# Altium PCB 400797.PcbDoc (part 2 of 8)
Units mm, origin at the board's own origin, x right, y up, seen from the top; angles counter-clockwise.
Board outline 155 x 63.5 mm, 4 copper layers (Top Layer, Mid-Layer 1, Mid-Layer 2, Bottom Layer), stack 1.514 mm thick; 333 components, 292 nets, 1555 pads, 2205 vias.
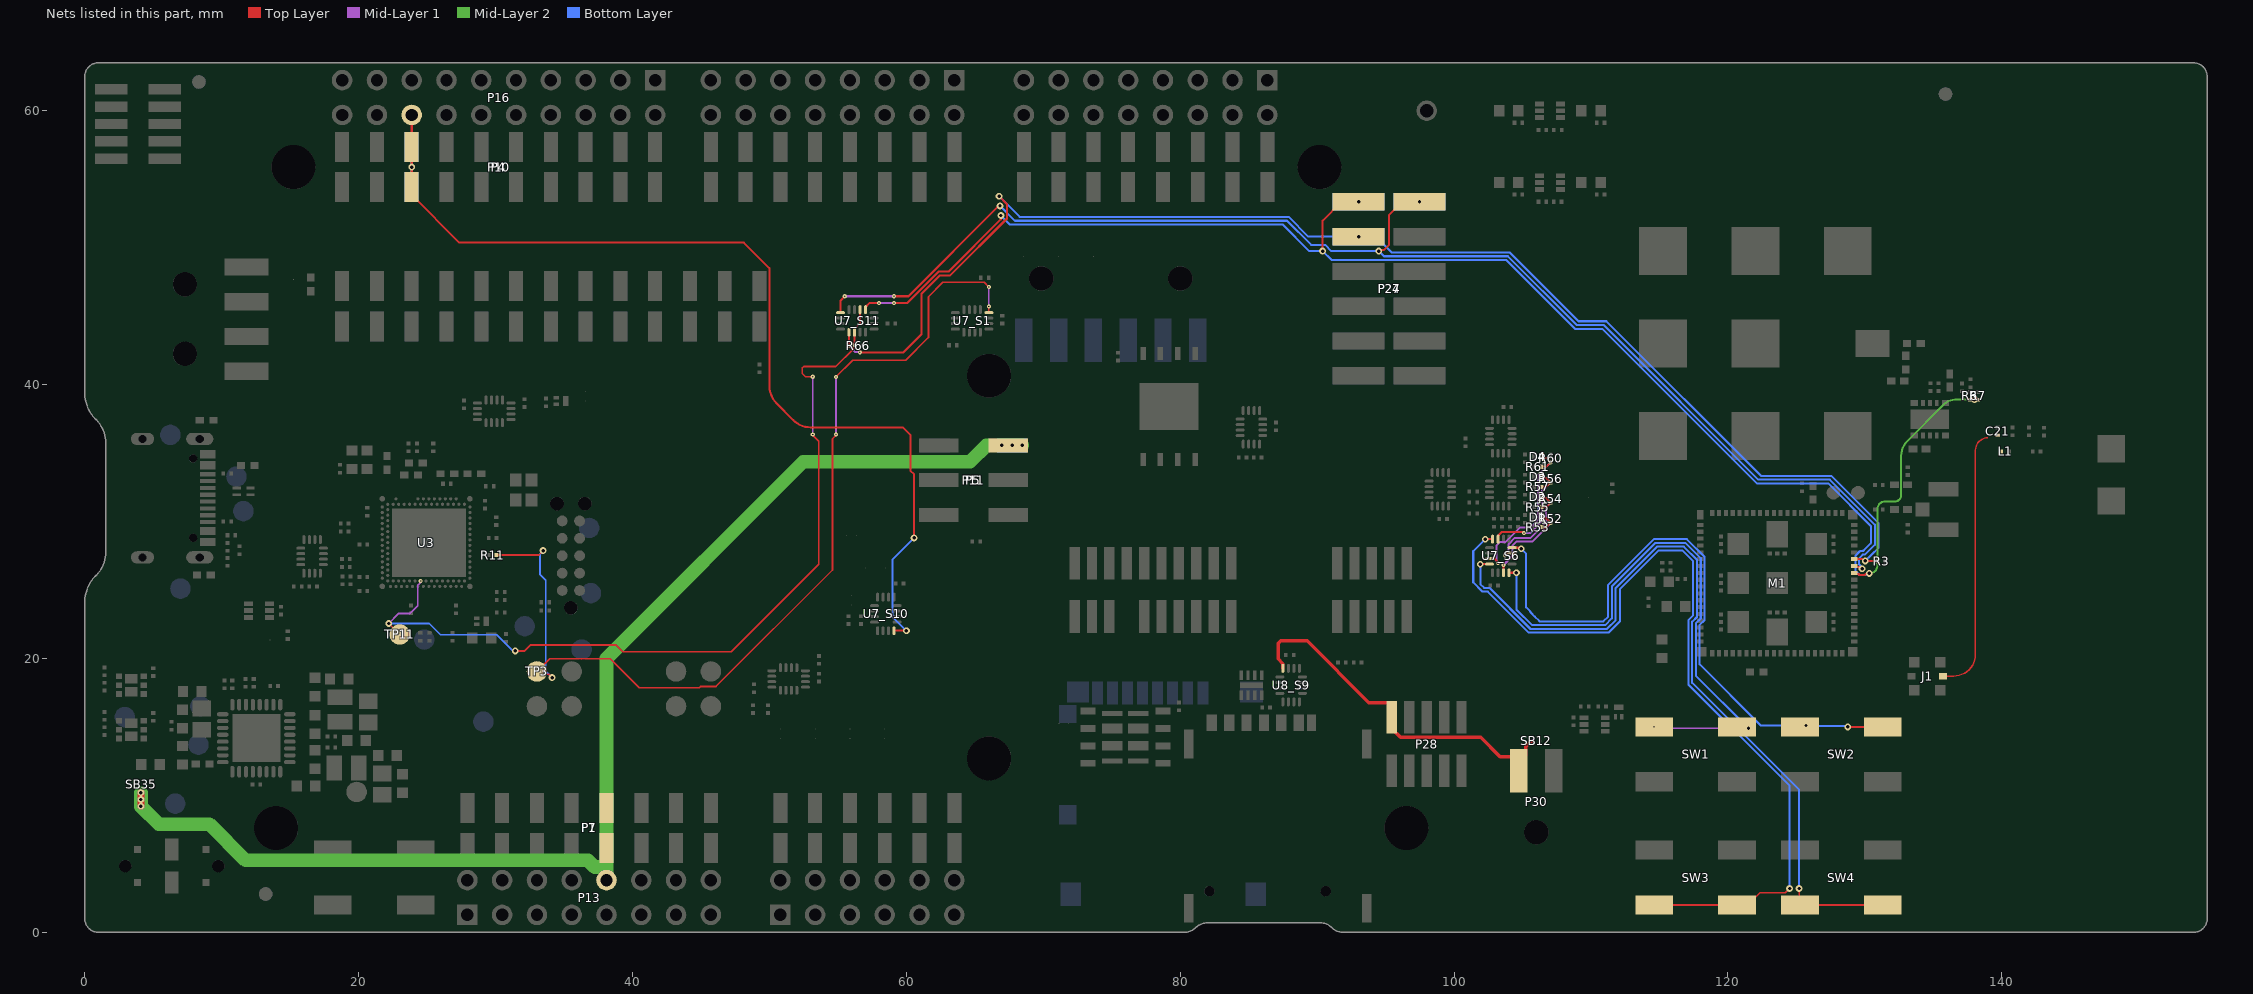
[diagram p4: the nets of this part, all layers, seen from the top]

## Footprints (in the part's own frame and the unit in brackets; to place one, negate y for a bottom-side part, rotate by r counter-clockwise, add the part's x,y. Pads: shape width x height; smd on the part's side, far side on the other; paste and mask are expansions set on the pad) (continued)
P822601 [mm] "Molded Diode, 2-Leads, Body 22,00x7,00mm, IPC Medium Density"
  rect 2x2 smd: 1(-8.89,-2.286) 2(-5.08,-2.286)
  Top Layer region: -21.6,1.254 -24.5,1.254 -24.5,3.754 -21.6,3.754
  Top Layer region: -22.4,-0.846 -24.5,-0.846 -24.5,0.854 -22.4,0.854
  Top Layer region: -21.6,-3.746 -24.5,-3.746 -24.5,-1.246 -21.6,-1.246
  Top Layer region: 24.6,-5.796 12.05,-5.796 12.05,-2.046 24.6,-2.046
  Top Layer region: 24.6,-2.046 21.7,-2.046 21.7,3.754 24.6,3.754
  Top Layer region: -3.67,-7.991 -8.05,-7.991 -8.05,-5.996 -3.67,-5.996
  Top Layer region: -3.67,-5.996 -5.71,-5.996 -5.71,-3.826 -3.67,-3.826
  Top Layer region: -3.67,-3.826 -6.399,-3.826 -6.4,-0.566 -3.67,-0.566
  Top Layer region: -10.45,-7.996 -12.45,-7.996 -12.45,-6.496 -10.45,-6.496
  Top Layer region: -9.2,-6.496 -12.45,-6.496 -12.45,-5.996 -9.2,-5.996
  Top Layer region: -9.45,-7.496 -9.95,-7.496 -9.95,-7.296 -9.45,-7.296
  Top Layer region: -8.45,-7.496 -8.95,-7.496 -8.95,-7.296 -8.45,-7.296
  Top Layer region: -8.45,-7.296 -9.95,-7.296 -9.95,-7.096 -8.45,-7.096
  Top Layer region: -9.45,-7.096 -9.95,-7.096 -9.95,-6.896 -9.45,-6.896
  Top Layer region: -8.45,-7.096 -8.95,-7.096 -8.95,-6.896 -8.45,-6.896
  Top Layer region: -8.6,-6.896 -8.8,-6.896 -8.8,-5.696 -8.6,-5.696
  Top Layer region: -8.2,-5.696 -9.2,-5.696 -9.2,-3.796 -8.2,-3.796
  Top Layer region: -7.3,-3.796 -10.4,-3.796 -10.4,-0.596 -7.3,-0.596
  Top Layer region: -9.45,-9.796 -9.95,-9.796 -9.95,-9.596 -9.45,-9.596
  Top Layer region: -8.45,-9.796 -8.95,-9.796 -8.95,-9.596 -8.45,-9.596
  Top Layer region: -8.45,-9.596 -9.95,-9.596 -9.95,-9.396 -8.45,-9.396
  Top Layer region: -9.45,-9.396 -9.95,-9.396 -9.95,-9.196 -9.45,-9.196
  Top Layer region: -8.45,-9.396 -8.95,-9.396 -8.95,-9.196 -8.45,-9.196
  Top Layer region: -9.6,-9.196 -9.8,-9.196 -9.8,-8.596 -9.6,-8.596
  Top Layer region: -9.45,-8.596 -9.95,-8.596 -9.95,-8.396 -9.45,-8.396
  Top Layer region: -8.45,-8.596 -8.95,-8.596 -8.95,-8.396 -8.45,-8.396
  Top Layer region: -8.45,-8.396 -9.95,-8.396 -9.95,-8.196 -8.45,-8.196
  Top Layer region: -9.45,-8.196 -9.95,-8.196 -9.95,-7.996 -9.45,-7.996
  Top Layer region: -8.45,-8.196 -8.95,-8.196 -8.95,-7.996 -8.45,-7.996
  Top Layer region: -9.6,-11.296 -9.8,-11.296 -9.8,-10.896 -9.6,-10.896
  Top Layer region: -9.45,-10.896 -9.95,-10.896 -9.95,-10.696 -9.45,-10.696
  Top Layer region: -8.45,-10.896 -8.95,-10.896 -8.95,-10.696 -8.45,-10.696
  Top Layer region: -8.45,-10.696 -9.95,-10.696 -9.95,-10.496 -8.45,-10.496
  Top Layer region: -9.45,-10.496 -9.95,-10.496 -9.95,-10.296 -9.45,-10.296
  Top Layer region: -8.45,-10.496 -8.95,-10.496 -8.95,-10.296 -8.45,-10.296
  Top Layer region: 24.75,-11.296 -8.05,-11.296 -8.05,-8.001 24.75,-8.001
  Top Layer region: -10.45,-11.296 -24.65,-11.296 -24.65,-7.996 -10.45,-7.996
  Bottom Layer region: -22.5,-3.546 -24.5,-3.546 -24.5,-2.546 -22.5,-2.546
  Bottom Layer region: -24.196,-2.546 -24.5,-2.546 -24.5,-2.046 -24.196,-2.046
  Bottom Layer region: -22.5,-2.046 -24.5,-2.046 -24.5,-1.046 -22.5,-1.046
  Bottom Layer region: -22.5,-1.046 -22.8,-1.046 -22.8,-0.546 -22.5,-0.546
  Bottom Layer region: -22.5,-0.546 -24.5,-0.546 -24.5,3.754 -22.5,3.754
  Bottom Layer region: -21,-3.546 -22,-3.546 -22,-1.046 -21,-1.046
  Bottom Layer region: -22.5,-5.046 -24.5,-5.046 -24.5,-4.046 -22.5,-4.046
  Bottom Layer region: 7.7,-5.796 6.7,-5.796 6.7,-4.896 7.7,-4.896
  Bottom Layer region: 9.2,-5.796 8.2,-5.796 8.2,-4.896 9.2,-4.896
  Bottom Layer region: 10.7,-5.796 9.7,-5.796 9.7,-4.896 10.7,-4.896
  Bottom Layer region: 13.2,-5.796 11.2,-5.796 11.2,-4.896 13.2,-4.896
  Bottom Layer region: 13.2,-4.896 6.7,-4.896 6.7,-4.596 13.2,-4.596
  Bottom Layer region: 7.7,-4.596 6.7,-4.596 6.7,-3.746 7.7,-3.746
  Bottom Layer region: 9.2,-4.596 8.2,-4.596 8.2,-3.746 9.2,-3.746
  Bottom Layer region: 10.7,-4.596 9.7,-4.596 9.7,-3.746 10.7,-3.746
  Bottom Layer region: 13.2,-4.596 11.2,-4.596 11.2,-3.746 13.2,-3.746
  Bottom Layer region: 6.2,-5.796 5.2,-5.796 5.2,-3.746 6.2,-3.746
  Bottom Layer region: 4.7,-5.796 3.7,-5.796 3.7,-3.746 4.7,-3.746
  Bottom Layer region: -3.86,-7.996 -12.45,-7.996 -12.45,-5.996 -3.86,-5.996
  Bottom Layer region: 24.752,-11.296 -24.648,-11.296 -24.65,-7.996 24.75,-7.996
  Multi-Layer pour cut-out: -39.95,5.08 39.05,5.08 39.05,-7.996 -39.95,-7.996
  silkscreen extent -25.2,-4.25 25.3,4.05, body extent -24.95,-4 25.05,4, height 3.2
RESC0603X03L_C [mm] "Chip Resistor, 2-Leads, Body 0.6x0.3mm, IPC High Density"
  rect 0.27x0.3 smd: 1(-0.285,0) 2(0.285,0)
  body extent -0.3,-0.15 0.3,0.15, height 0.23
RESC0603X03L_C_NC [mm] "Chip Resistor, 2-Leads, Body 0.6x0.3mm, IPC High Density"
  rect 0.27x0.3 smd: 1(-0.285,0) 2(0.285,0)
RESC1005X04L [mm] "Chip Resistor, 2-Leads, Body 1.0x0.5mm, IPC High Density"
  rect 0.6x0.55 smd mask+0.05: 1(-0.5,0) 2(0.5,0)
  body extent -0.5,-0.25 0.5,0.25, height 0.3
RESC1005X04L_NC [mm] "Chip Resistor, 2-Leads, Body 1.0x0.5mm, IPC High Density"
  rect 0.6x0.55 smd mask+0.05: 1(-0.5,0) 2(0.5,0)
RESC2012X11L [mm] "Chip Resistor, 2-Leads, Body 2.0x1.3mm, IPC High Density"
  rect 1.15x1.35 smd: 1(-0.775,0) 2(0.775,0)
  silkscreen extent -1.45,-0.77 1.45,0.77, body extent -1,-0.62 1,0.63, height 0.5
SD-80259-001 [mm] "USB TYPE C RECEPTACLE, 16 PIN"
  round 0.6 hole 0.6 unplated: 0(-2.89,1.315) 0(2.89,1.315)
  rect 0.6x1.14 smd: A1(-3.2,2.385) A4(-2.4,2.385) A9(2.4,2.385) A12(3.2,2.385)
  rect 0.3x1.14 smd: A5(-1.25,2.385) A6(-0.25,2.385) A7(0.25,2.385) A8(1.25,2.385) B5(1.75,2.385) B6(0.75,2.385) B7(-0.75,2.385) B8(-1.75,2.385)
  oval 0.9x2 hole 0.6 slot 1.7 at 90 deg: SHLD(-4.325,1.795) SHLD(4.325,1.795)
  oval 0.9x1.7 hole 0.6 slot 1.4 at 90 deg: SHLD(-4.325,-2.385) SHLD(4.325,-2.385)
  oval 0.9x2 on Top Paste: ""(-4.32,1.795) ""(4.32,1.795)
  oval 0.9x1.7 on Top Paste: ""(-4.32,-2.385) ""(4.32,-2.385)
  silkscreen extent -4.33,-4.48 4.33,0.47, body extent -4.48,-4.98 4.48,2.74, height 3.26
SEGGER_LOGO_S [mm] "Logo 7.82 mm x 3.84 mm, print overlay"
  silkscreen extent -3.91,-1.92 3.91,1.92
Shunt_2.54mm_Horizontal [mm]
  body extent 0,-2.54 5.03,2.54, height 2.99
SKY65943-11 [mm]
  rect 0.425x0.515 smd mask+0.05: 1(-1.188,1.144) 5(-1.188,-1.144) 6(1.188,-1.144) 10(1.188,1.144)
  rect 0.425x0.275 smd mask+0.05: 2(-1.188,0.5) 3(-1.188,0) 4(-1.188,-0.5) 7(1.188,-0.5) 8(1.188,0) 9(1.188,0.5)
  rect 1.45x2.802 smd paste-2 mask-5: 11(0,0)
  rect 1.55x2.487 on Top Solder: ""(0,0)
  Top Layer region: -0.988,0.887 -0.713,0.887 -0.713,1.4 -0.988,1.4
  Top Layer region: 0.713,-1.4 0.988,-1.4 0.988,-0.887 0.713,-0.887
  Top Layer region: 0.712,0.362 0.987,0.362 0.987,0.637 0.712,0.637
  Top Layer region: -0.712,-0.362 -0.987,-0.362 -0.987,-0.637 -0.712,-0.637
  body extent -1.25,-1.25 1.25,1.25, height 0.71
SOCKET_1x6_SMD [mm] "Socket, 2.54mm, SMD"
  rect 1.02x2.19 smd: 1(0,-1.465) 1(0,1.465) 2(2.54,-1.465) 2(2.54,1.465) 3(5.08,-1.465) 3(5.08,1.465) 4(7.62,-1.465) 4(7.62,1.465) 5(10.16,-1.465) 5(10.16,1.465) 6(12.7,1.465) 6(12.7,-1.465)
  silkscreen extent -1.27,-1.27 13.97,1.27, body extent -1.27,-2.29 13.97,2.29, height 7.47
SOCKET_1x8_SMD [mm] "Socket, 2.54mm, SMD"
  rect 1.02x2.19 smd: 1(0,-1.465) 1(0,1.465) 2(2.54,-1.465) 2(2.54,1.465) 3(5.08,-1.465) 3(5.08,1.465) 4(7.62,-1.465) 4(7.62,1.465) 5(10.16,-1.465) 5(10.16,1.465) 6(12.7,1.465) 6(12.7,-1.465) 7(15.24,-1.465) 7(15.24,1.465) 8(17.78,-1.465) 8(17.78,1.465)
  silkscreen extent -1.27,-1.27 19.05,1.27, body extent -1.27,-2.29 19.05,2.29, height 7.47
SOCKET_1x10_SMD [mm] "Socket, 2.54mm, SMD"
  rect 1.02x2.19 smd: 1(0,1.465) 1(0,-1.465) 2(2.54,-1.465) 2(2.54,1.465) 3(5.08,-1.465) 3(5.08,1.465) 4(7.62,-1.465) 4(7.62,1.465) 5(10.16,-1.465) 5(10.16,1.465) 6(12.7,-1.465) 6(12.7,1.465) 7(15.24,-1.465) 7(15.24,1.465) 8(17.78,-1.465) 8(17.78,1.465) 9(20.32,-1.465) 9(20.32,1.465) 10(22.86,-1.465) 10(22.86,1.465)
  silkscreen extent -1.27,-1.27 24.13,1.27, body extent -1.27,-2.29 24.13,2.29, height 7.47
SOCKET_2x3_SMD-2.54mm-bottom-NC [mm] "Socket, 2.54mm, SMD"
  rect 1.02x2.22 smd far side: 1(-2.54,-2.825) 2(-2.54,2.825) 3(0,-2.825) 4(0,2.825) 5(2.54,-2.825) 6(2.54,2.825)
SOCKET_2x6_SMD-2.54mm#1 [mil]
  rect 50x150 smd: 1(-250,-87.5) 2(-250,87.5) 3(-150,-87.5) 4(-150,87.5) 5(-50,-87.5) 6(-50,87.5) 7(50,-87.5) 8(50,87.5) 9(150,-87.5) 10(150,87.5) 11(250,-87.5) 12(250,87.5)
  silkscreen extent -310,-127 300,100, body extent -300,-138 300,139, height 290
SOCKET_2x6_SMD-2.54mm#2 [mil] "Board-Board Conn, Header, 4-way, 2-row"
  rect 50x150 smd: 1(-250,87.5) 2(-250,-87.5) 3(-150,87.5) 4(-150,-87.5) 5(-50,87.5) 6(-50,-87.5) 7(50,87.5) 8(50,-87.5) 9(150,87.5) 10(150,-87.5) 11(250,87.5) 12(250,-87.5)
  silkscreen extent -310,-100 300,127
SODFL35X40-2N [mm] "SODFL, 2-Leads, Body 0,60x0,35mm, IPC Medium Density"
  rect 0.25x0.6 smd: 1(-0.325,0) 3(0.325,0)
  body extent -0.53,-0.33 0.53,0.33, height 0.4
Solderbridge [mil]
  round 1 smd paste-99999: 1(-13.78,0) 2(13.78,0)
  Top Layer region: -7.49,19.36 -15.76,15.74 -21.55,8.8 -23.62,0 -23.62,0 -21.55,-8.79 -15.76,-15.74 -7.49,-19.36 -7.49,-19.36 -6.18,-19.31 -5.02,-18.71 -4.22,-17.68 -3.94,-16.4 -3.94,-16.4 -3.94,16.4 -4.22,17.68 -5.02,18.71 -6.18,19.31 -7.49,19.36
  Top Layer region: 7.49,-19.36 15.76,-15.74 21.55,-8.8 23.62,0 23.62,0 21.55,8.79 15.76,15.74 7.49,19.36 7.49,19.36 6.18,19.31 5.02,18.71 4.22,17.68 3.94,16.4 3.94,16.4 3.94,-16.4 4.22,-17.68 5.02,-18.71 6.18,-19.31 7.49,-19.36
Solderbridge_Shorted [mil]
  round 1 smd paste-99999: 1(-13.78,0) 2(13.78,0)
  Top Layer region: -4.92,3.94 -4.92,-3.94 4.92,-3.94 4.92,3.94
  Top Layer region: -7.49,19.36 -15.76,15.74 -21.55,8.8 -23.62,0 -23.62,0 -21.55,-8.79 -15.76,-15.74 -7.49,-19.36 -7.49,-19.36 -6.18,-19.31 -5.02,-18.71 -4.22,-17.68 -3.94,-16.4 -3.94,-16.4 -3.94,16.4 -4.22,17.68 -5.02,18.71 -6.18,19.31 -7.49,19.36
  Top Layer region: 7.49,-19.36 15.76,-15.74 21.55,-8.8 23.62,0 23.62,0 21.55,8.79 15.76,15.74 7.49,19.36 7.49,19.36 6.18,19.31 5.02,18.71 4.22,17.68 3.94,16.4 3.94,16.4 3.94,-16.4 4.22,-17.68 5.02,-18.71 6.18,-19.31 7.49,-19.36
Solderbridge_Shorted_Power [mil]
  round 1 smd paste-99999: 1(-13.84,0.21) 2(13.72,0.21)
  Top Layer region: -4.92,9.84 4.92,9.84 4.92,-9.84 -4.92,-9.84
  Top Layer region: 7.43,-19.16 15.71,-15.53 21.49,-8.59 23.56,0.21 23.56,0.21 21.49,9 15.71,15.94 7.43,19.57 7.43,19.57 6.12,19.52 4.96,18.92 4.16,17.89 3.88,16.61 3.88,16.61 3.88,-16.2 4.16,-17.47 4.96,-18.51 6.12,-19.11 7.43,-19.16
  Top Layer region: -7.54,19.57 -15.82,15.94 -21.61,9 -23.68,0.21 -23.68,0.21 -21.61,-8.59 -15.82,-15.53 -7.54,-19.16 -7.54,-19.16 -6.24,-19.11 -5.08,-18.51 -4.28,-17.47 -4,-16.2 -3.99,-16.2 -3.99,16.61 -4.28,17.89 -5.08,18.92 -6.24,19.52 -7.54,19.57
SON50P210X160X65_HS-9N [mm] "SON, 8-Leads, Body 2.10x1.60mm, Pitch 0.50mm, Thermal Pad 1.70x0.4mm, IPC Medium Density"
  rect 0.7x0.25 smd mask+0.05: 1(-0.725,0.75) 2(-0.725,0.25) 3(-0.725,-0.25) 4(-0.725,-0.75) 5(0.725,-0.75) 6(0.725,-0.25) 7(0.725,0.25) 8(0.725,0.75)
  rect 0.4x1.7 smd paste-2 mask+0.05: 9(0,0)
  rect 0.3x0.75 on Top Paste: ""(0,0.425) ""(0,-0.425)
  silkscreen extent -1.26,1.2 -1.16,1.26, body extent -0.85,-1.1 0.85,1.1, height 0.65
SON127P600X90_HS-8N [mm] "SON, 8-Leads, Body 5.00x6.00mm, Pitch 1.27mm, IPC Medium Density"
  rect 1.5x0.35 smd paste-1.27: 0(-0.95,-1.73) 0(-0.95,1.73) 0(0.95,-1.73) 0(0.95,1.73)
  rect 1.5x0.7 smd paste-1.27: 0(-0.95,-0.635) 0(-0.95,0.635) 0(0.95,-0.635) 0(0.95,0.635)
  rect 1.1x0.5 smd paste-1.27: 1(-2.75,1.905) 2(-2.75,0.635) 3(-2.75,-0.635) 4(-2.75,-1.905) 5(2.75,-1.905) 6(2.75,-0.635) 7(2.75,0.635) 8(2.75,1.905)
  silkscreen extent -3.6,-2.58 3.08,2.72, body extent -3,-2.5 3,2.5, height 0.65
SON127P800X80_HS-9N [mm] "SON, 8-Leads, Body 6.00x8.00mm, Pitch 1.27mm, Thermal Pad 4.30x3.40mm, IPC Medium Density"
  rect 0.95x0.4 smd: 1(-3.87,1.905) 2(-3.87,0.635) 3(-3.87,-0.635) 4(-3.87,-1.905) 5(3.87,-1.905) 6(3.87,-0.635) 7(3.87,0.635) 8(3.87,1.905)
  rect 3.4x4.3 smd paste-1.7: 9(0,0)
  silkscreen extent -4.52,-3.18 4.18,3.52, body extent -4.05,-3.05 4.05,3.05, height 0.8
SOTFL50P162X60-6N [mm] "SOTFL, 6-Leads, Body 1.60x1.63mm, Pitch 0.50mm, IPC Medium Density"
  rect 0.65x0.35 smd: 1(-0.775,0.5) 2(-0.775,0) 3(-0.775,-0.5) 4(0.775,-0.5) 5(0.775,0) 6(0.775,0.5)
  silkscreen extent -0.9,-0.82 0.05,1.35, body extent -0.81,-0.85 0.81,0.85, height 0.6
TC2050-IDC-NLFP [mil]
  round 39 hole 39 unplated: 0(-150,0) 0(150,-40) 0(150,40)
  round 31 smd paste-196.85: 1(-100,-25) 2(-50,-25) 3(0,-25) 4(50,-25) 5(100,-25) 6(100,25) 7(50,25) 8(0,25) 9(-50,25) 10(-100,25)
  Top Layer pour cut-out: -100,25 -100,-25 100,-25 100,25
TESTPAD-TH [mm]
  round 1.5 hole 1: 1(0,0)
TP_SMD_D1.0mm [mm] "Test point - pad 1.0mm"
  round 1 smd paste-5: 1(0,0)
TP_SMD_D1.5mm [mm] "Test point - pad 1.5mm"
  round 1.5 smd paste-5: 1(0,0)
  body extent -0.75,-0.75 0.75,0.75, height 0.05
UFDFN50P120X250X55-8N [mm]
  round 0.025 smd: 1(-0.5,0.75) 4(-0.5,-0.75) 5(0.5,-0.75) 8(0.5,0.75)
  rect 0.6x0.2 smd: 2(-0.5,0.25) 3(-0.5,-0.25) 6(0.5,-0.25) 7(0.5,0.25)
  Top Layer region: 0.8,-0.85 0.4,-0.85 0.4,-1.05 0.2,-1.05 0.2,-0.65 0.8,-0.65
  Top Layer region: -0.2,-1.05 -0.4,-1.05 -0.4,-0.85 -0.8,-0.85 -0.8,-0.65 -0.2,-0.65
  Top Layer region: 0.4,0.85 0.8,0.85 0.8,0.65 0.2,0.65 0.2,1.05 0.4,1.05
  Top Layer region: -0.2,0.65 -0.8,0.65 -0.8,0.85 -0.4,0.85 -0.4,1.05 -0.2,1.05
  silkscreen extent -1.08,1.21 -0.95,1.33, body extent -0.6,-1.25 0.6,1.25, height 0.6
WEE_3x4.5mm [mm]
  silkscreen extent -1.47,-2.7 1.47,1.71
XQFN40P180X260X50-16N [mm] "QFN, 16-Leads, Body 1.80x2.60mm, Pitch 0.40mm, IPC Medium Density"
  oval 0.65x0.22 smd paste-0.02 mask+0.04: 1(-0.825,0.6) 2(-0.825,0.2) 3(-0.825,-0.2) 4(-0.825,-0.6) 9(0.825,-0.6) 10(0.825,-0.2) 11(0.825,0.2) 12(0.825,0.6)
  oval 0.22x0.65 smd paste-0.02 mask+0.04: 5(-0.6,-1.225) 6(-0.2,-1.225) 7(0.2,-1.225) 8(0.6,-1.225) 13(0.6,1.225) 14(0.2,1.225) 15(-0.2,1.225) 16(-0.6,1.225)
  body extent -0.91,-1.31 0.91,1.31, height 0.55

## Part data
A1: "ANTENNA PRESTTA OCTABAND LTE", Manufacturer=Ethertronics, Part number IPS=00000009001, Part number NEMS=100700043, Part number Norautron=N.A., Artikkelnr Noca=N.A., Author=rsk, Component Class=Antennas, Component Status=Active, ComponentLink1Description=Datasheet, ComponentLink1URL=N.A., ComponentLink2Description="Supplier link", ComponentLink2URL=N.A., Footprint Doc=P822601, HelpURL=http://www.ethertronics.com/wp-content/uploads/2016/11/Prestta-P822601-P822602-Standard-Cellular-Octa-Band-20160904.pdf, LatestRevisionDate=2017-07-28, Manufacturer Part Number=P822601, Note=N.A., Pad Count=2, Part Number=P822601, PartId=100700043, Published=2017-07-28, Supplier 1=moreelectronics.dk, Supplier 2=Digi-Key, Supplier Part Number 1=P822601, Supplier Part Number 2=939-1057-1-ND
A2: library part DSGP.1575.18.4.C.02, "18 x 18 mm Low Profile GPS L1 / GALILEO E1 Passive Patch Antenna", Manufacturer=Taoglas, Part number IPS=00000007687, Part number NEMS=100700073, Part number Norautron=N.A., Artikkelnr Noca=N.A., Author=rubr, Component Class=Antennas, Component Status=Active, ComponentLink1Description=Datasheet, ComponentLink1URL=https://www.taoglas.com/datasheets/DSGP.1575.18.4.A.02.pdf, ComponentLink2Description="Supplier link", ComponentLink2URL=https://www.digikey.com/product-detail/en/taoglas-limited/DSGP.1575.18.4.A.02/931-1511-1-ND/8275289, Footprint Doc=DSGP.1575.18.4.C.02, HelpURL=https://www.taoglas.com/product/18184mm-dsgp-1575-184-gps-l1-galileo-e1-ceramic-patch-copy/?compare=16929, LatestRevisionDate=2023-01-01, Manufacturer Part Number=DSGP.1575.18.4.C.02, Note=N.A., Pad Count=2, Part Number=DSGP.1575.18.4.C.02, PartId=100700073, Published=2022-01-13, Supplier 1=N.A., Supplier 2=N.A., Supplier Part Number 1=N.A., Supplier Part Number 2=N.A.
C1 C2: library part C0201-1µ0-10V-X5R-GRM033R61A105ME15, "Capacitor, X5R, ±20%, 10V", Manufacturer=Murata, Manufacturer Part Number=GRM033R61A105ME15, Part number IPS=N.A., Part number NEMS=100200545, Supplier Part Number 1=490-13226-1-ND, Artikkelnr Noca=N.A., Author=rubr, Component Class=Capacitors, Component Status=Active, ComponentLink1Description=Datasheet, ComponentLink1URL=https://search.murata.co.jp/Ceramy/image/img/A01X/G101/ENG/GRM033R61A105ME15-01.pdf, ComponentLink2Description="Supplier link", ComponentLink2URL=N.A., Footprint Doc=0201, HelpURL=https://www.murata.com/en-us/products/productdetail?partno=GRM033R61A105ME15%23, LatestRevisionDate=2023-03-22, Note=10V, Pad Count=2, Part Number=C0201-1µ0-10V-X5R-GRM033R61A105ME15, Part number Norautron=N.A., PartId=100200545, Published=2023-03-22, Supplier 1=Digi-Key, Supplier 2=N.A., Supplier Part Number 2=N.A.
C3 C7: library part C0603-10µ-10V-X6S-GRM188C81A106MA73, "Capacitor, Ceramic, 10µF 10V X6S 0603,±20%", Manufacturer=Murata, Manufacturer Part Number=GRM188C81A106MA73, Part number IPS=N.A., Part number NEMS=100200520, Supplier Part Number 1=490-7197-2-ND, Artikkelnr Noca=N.A., Author=prbu, Component Class=Capacitors, Component Status=Active, ComponentLink1Description=Datasheet, ComponentLink1URL=https://www.murata.com/en-sg/products/productdetail?partno=GRM188C81A106MA73%23, ComponentLink2Description="Supplier link", ComponentLink2URL=https://www.digikey.com/en/products/detail/murata-electronics/GRM188C81A106MA73D/3900461, Footprint Doc=0603, HelpURL=N.A., LatestRevisionDate=2022-07-01, Note=10V, Pad Count=2, Part Number=C0603-10µ-10V-X6S-GRM188C81A106MA73, Part number Norautron=N.A., PartId=100200520, Published=2022-07-01, Supplier 1=Digi-Key, Supplier 2=Mouser, Supplier Part Number 2=81-GRM188C81A106MA3D
C4 C8 C10 C15 C16 C24 C25 C26 C27 C31 C32 C33 C34 C39 C42 C43 C51 C52_S1 C52_S2 C52_S3 C52_S4 C52_S5 C52_S6 C52_S8 C52_S10 C52_S11 C53_S7 C53_S9 C62: library part C0201-100n, "Capacitor, X5R, ±10%", Manufacturer=N.A., Part number IPS="00000001248, 00000002505", Part number NEMS=100200078, Part number Norautron=262071862, Artikkelnr Noca=N.A., Author=rsk, Component Class=Capacitors, Component Status=Active, ComponentLink1Description=Datasheet, ComponentLink1URL=N.A., ComponentLink2Description="Supplier link", ComponentLink2URL=N.A., Footprint Doc=0201, HelpURL=N.A., LatestRevisionDate=2017-11-09, Manufacturer Part Number=N.A., Note=16V, Pad Count=2, Part Number=C0201-100n, PartId=100200078, Published=2014-11-13, Supplier 1=N.A., Supplier 2=N.A., Supplier Part Number 1=N.A., Supplier Part Number 2=N.A.
  C16: Assembly="Not mounted"
C5 C6: library part C0402-4µ7-10V-X5R, "Capacitor, X5R, 10V", Manufacturer=Murata, Manufacturer Part Number=GRM155R61A475MEAAD, Part number IPS=N.A., Part number NEMS=100200415, Supplier Part Number 1=490-14306-1-ND, Artikkelnr Noca=N.A., Author=rsk, Component Class=Capacitors, Component Status=Active, ComponentLink1Description=Datasheet, ComponentLink1URL=http://search.murata.co.jp/Ceramy/image/img/A01X/G101/ENG/GRM155R61A475MEAA-01.pdf, ComponentLink2Description="Supplier link", ComponentLink2URL=https://www.digikey.com/product-detail/en/murata-electronics-north-america/GRM155R61A475MEAAD/490-14306-1-ND/6234742, Footprint Doc=0402, HelpURL=https://psearch.en.murata.com/capacitor/product/GRM155R61A475MEAA%23.html, LatestRevisionDate=2020-10-13, Note=10V, Pad Count=2, Part Number=C0402-4µ7-10V-X5R, Part number Norautron=N.A., PartId=100200415, Published=2018-10-04, Supplier 1=Digi-Key, Supplier 2=N.A., Supplier Part Number 2=N.A.
C9: library part C0402-1µ0-16V-X5R, "Capacitor, Ceramic, X5R, ±10%, 16V", Manufacturer=Murata, Manufacturer Part Number=GRT155R61C105KE01D, Part number IPS=N.A., Part number NEMS=100200452, Supplier Part Number 1=490-12255-1-ND, Artikkelnr Noca=N.A., Author=rsk, Component Class=Capacitors, Component Status=Active, ComponentLink1Description=Datasheet, ComponentLink1URL=https://search.murata.co.jp/Ceramy/image/img/A01X/G101/ENG/GRT155R61C105KE01-01.pdf, ComponentLink2Description="Supplier link", ComponentLink2URL=https://www.murata.com/en-global/products/productdetail?partno=GRT155R61C105KE01%23, Footprint Doc=0402, HelpURL=N.A., LatestRevisionDate=2020-12-15, Note=16V, Pad Count=2, Part Number=C0402-1µ0-16V-X5R, Part number Norautron=N.A., PartId=100200452, Published=2020-12-15, Supplier 1=Digi-Key, Supplier 2=Mouser, Supplier Part Number 2=81-GRT155R61C105KE1D
C11 C12 C13: library part C0201-39p, "Capacitor, NP0, ±1%, 25V", Manufacturer=Murata, Manufacturer Part Number=GRM0335C1E390FA01, Part number IPS=00000001668, Part number NEMS=100200039, Part number Norautron=N.A., Artikkelnr Noca=N.A., Author=rsk, Component Class=Capacitors, Component Status=Active, ComponentLink1Description=Datasheet, ComponentLink1URL=N.A., ComponentLink2Description="Supplier link", ComponentLink2URL=N.A., Footprint Doc=0201, HelpURL=N.A., LatestRevisionDate=2019-04-16, Note=25V, Pad Count=2, Part Number=C0201-39p, PartId=100200039, Published=2019-04-16, Supplier 1=N.A., Supplier 2=N.A., Supplier Part Number 1=N.A., Supplier Part Number 2=N.A.
C14 C17: library part C0201-100p, "Capacitor, NP0, ±2%, 25V", Manufacturer=Murata, Manufacturer Part Number=GRM0335C1E101GA01, Part number IPS=00000007853, Part number NEMS=100200044, Part number Norautron=N.A., Artikkelnr Noca=N.A., Author=rsk, Component Class=Capacitors, Component Status=Active, ComponentLink1Description=Datasheet, ComponentLink1URL=N.A., ComponentLink2Description="Supplier link", ComponentLink2URL=N.A., Footprint Doc=0201, HelpURL=N.A., LatestRevisionDate=2019-04-16, Note=25V, Pad Count=2, Part Number=C0201-100p, PartId=100200044, Published=2019-04-16, Supplier 1=N.A., Supplier 2=N.A., Supplier Part Number 1=N.A., Supplier Part Number 2=N.A.
C18: library part C0402-N.C., "Not mounted", Manufacturer=N.A., Part number NEMS=100200105, Artikkelnr Noca=N.A., Assembly="Not mounted", Author=rsk, Component Class=Capacitors, Component Status=Active, ComponentLink1Description=Datasheet, ComponentLink1URL=N.A., ComponentLink2Description="Supplier link", ComponentLink2URL=N.A., Footprint Doc=0402, HelpURL=N.A., LatestRevisionDate=2009-05-08, Manufacturer Part Number=N.A., Note="Chip Cap", Pad Count=2, Part Number=C0402-N.C., Part number IPS=N.A., Part number Norautron=N.A., PartId=100200105, Published=2009-05-08, Supplier 1=N.A., Supplier 2=N.A., Supplier Part Number 1=N.A., Supplier Part Number 2=N.A.
C19 C21 C22 C23 C49: library part C0201-N.C., "Not mounted", Manufacturer=N.A., Part number NEMS=100200001, Artikkelnr Noca=N.A., Assembly="Not mounted", Author=rsk, Component Class=Capacitors, Component Status=Active, ComponentLink1Description=Datasheet, ComponentLink1URL=N.A., ComponentLink2Description="Supplier link", ComponentLink2URL=N.A., Footprint Doc=0201, HelpURL=N.A., LatestRevisionDate=2014-11-13, Manufacturer Part Number=N.A., Note="Chip Cap", Pad Count=2, Part Number=C0201-N.C., Part number IPS=N.A., Part number Norautron=N.A., PartId=100200001, Published=2014-11-13, Supplier 1=N.A., Supplier 2=N.A., Supplier Part Number 1=N.A., Supplier Part Number 2=N.A.
C20: library part C0201-3.5p, "Capacitor, NP0, ±0.1pF, 25V", Manufacturer=Murata, Manufacturer Part Number=GJM0335C1H3R5BB01E, Part number IPS=00000001469, Part number NEMS=100200023, Part number Norautron=N.A., Artikkelnr Noca=N.A., Author=rsk, Component Class=Capacitors, Component Status=Active, ComponentLink1Description=Datasheet, ComponentLink1URL=N.A., ComponentLink2Description="Supplier link", ComponentLink2URL=N.A., Footprint Doc=0201, HelpURL=N.A., LatestRevisionDate=2019-02-22, Note=25V, Pad Count=2, Part Number=C0201-3.5p, PartId=100200023, Published=2019-02-22, Supplier 1=N.A., Supplier 2=N.A., Supplier Part Number 1=N.A., Supplier Part Number 2=N.A.
C28 C29 C35 C36 C40 C64: library part C0402-1µ0-10V-X5R, "Capacitor, Ceramic, X5R, ±10%, 10V", Manufacturer=N.A., Part number NEMS=100200482, Artikkelnr Noca=N.A., Author=rubr, Component Class=Capacitors, Component Status=Active, ComponentLink1Description=Datasheet, ComponentLink1URL=N.A., ComponentLink2Description="Supplier link", ComponentLink2URL=N.A., Footprint Doc=0402, HelpURL=N.A., LatestRevisionDate=2021-07-22, Manufacturer Part Number=N.A., Note=10V, Pad Count=2, Part Number=C0402-1µ0-10V-X5R, Part number IPS=N.A., Part number Norautron=N.A., PartId=100200482, Published=2021-07-22, Supplier 1=N.A., Supplier 2=N.A., Supplier Part Number 1=N.A., Supplier Part Number 2=N.A.
C30: library part C0201-2n2, "Capacitor, X7R, ±10%, 10V", Manufacturer=N.A., Part number IPS=00000001778, Part number NEMS=100200060, Part number Norautron=26470002, Artikkelnr Noca=N.A., Author=rsk, Component Class=Capacitors, Component Status=Active, ComponentLink1Description=Datasheet, ComponentLink1URL=N.A., ComponentLink2Description="Supplier link", ComponentLink2URL=N.A., Footprint Doc=0201, HelpURL=N.A., LatestRevisionDate=2014-11-13, Manufacturer Part Number=N.A., Note=10V, Pad Count=2, Part Number=C0201-2n2, PartId=100200060, Published=2014-11-13, Supplier 1=N.A., Supplier 2=N.A., Supplier Part Number 1=N.A., Supplier Part Number 2=N.A.
C37 C38 C58: library part C0603-4µ7-10V-X5R, "Capacitor, Ceramic, X5R, ±10%, 10V", Manufacturer=N.A., Part number NEMS=100200479, Part number Norautron=262081761, Artikkelnr Noca=N.A., Author=rubr, Component Class=Capacitors, Component Status=Active, ComponentLink1Description=Datasheet, ComponentLink1URL=N.A., ComponentLink2Description="Supplier link", ComponentLink2URL=N.A., Footprint Doc=0603, HelpURL=N.A., LatestRevisionDate=2021-07-22, Manufacturer Part Number=N.A., Note=10V, Pad Count=2, Part Number=C0603-4µ7-10V-X5R, Part number IPS=N.A., PartId=100200479, Published=2021-07-22, Supplier 1=N.A., Supplier 2=N.A., Supplier Part Number 1=N.A., Supplier Part Number 2=N.A.
C41 C48 C50: library part C0201-10n, "Capacitor, X7R, ±10%", Manufacturer=N.A., Part number IPS=00000003480, Part number NEMS=100200067, Part number Norautron=26621779, Artikkelnr Noca=N.A., Author=rsk, Component Class=Capacitors, Component Status=Active, ComponentLink1Description=Datasheet, ComponentLink1URL=N.A., ComponentLink2Description="Supplier link", ComponentLink2URL=N.A., Footprint Doc=0201, HelpURL=N.A., LatestRevisionDate=2017-11-09, Manufacturer Part Number=N.A., Note=10V, Pad Count=2, Part Number=C0201-10n, PartId=100200067, Published=2014-11-13, Supplier 1=N.A., Supplier 2=N.A., Supplier Part Number 1=N.A., Supplier Part Number 2=N.A.
C44 C45 C46 C47: library part C0201-1µ0, "Capacitor, X5R, ±10%", Manufacturer=N.A., Part number IPS=00000001723, Part number NEMS=100200084, Supplier Part Number 1=1276-6795-1-ND, Artikkelnr Noca=N.A., Author=rsk, Component Class=Capacitors, Component Status=Active, ComponentLink1Description=Datasheet, ComponentLink1URL=N.A., ComponentLink2Description="Supplier link", ComponentLink2URL=N.A., Footprint Doc=0201, HelpURL=N.A., LatestRevisionDate=2016-08-22, Manufacturer Part Number=N.A., Note=10V, Pad Count=2, Part Number=C0201-1µ0, Part number Norautron=N.A., PartId=100200084, Published=2009-05-08, Supplier 1=Digi-Key, Supplier 2=N.A., Supplier Part Number 2=N.A.
C54: library part C0603-1µ0-10V-X5R, "Capacitor, Ceramic, 1.0µF 10V X5R 0603,±10%", Manufacturer=N.A., Part number NEMS=100200528, Artikkelnr Noca=N.A., Author=getr, Component Class=Capacitors, Component Status=Active, ComponentLink1Description=Datasheet, ComponentLink1URL=N.A., ComponentLink2Description="Supplier link", ComponentLink2URL=N.A., Footprint Doc=0603, HelpURL=N.A., LatestRevisionDate=2022-10-06, Manufacturer Part Number=N.A., Note=10V, Pad Count=2, Part Number=C0603-1µ0-10V-X5R, Part number IPS=N.A., Part number Norautron=N.A., PartId=100200528, Published=2022-10-06, Supplier 1=N.A., Supplier 2=N.A., Supplier Part Number 1=N.A., Supplier Part Number 2=N.A.
C55 C56 C57 C59 C60: library part C0603-10µ-10V-X7T-GRM188D71A106MA73, "Capacitor, X7T, ±20%, 10V", Manufacturer=Murata, Manufacturer Part Number=GRM188D71A106MA73, Part number IPS=00000004696, Part number NEMS=100200414, Part number Norautron=N.A., Supplier Part Number 1=490-7200-1-ND, Artikkelnr Noca=N.A., Author=rsk, Component Class=Capacitors, Component Status=Active, ComponentLink1Description=Datasheet, ComponentLink1URL=N.A., ComponentLink2Description="Supplier link", ComponentLink2URL=N.A., Footprint Doc=0603, HelpURL=https://no.mouser.com/datasheet/2/281/murata_03052018_GRM_Series_1-1310166.pdf, LatestRevisionDate=2021-07-22, Note=10VDC, Pad Count=2, Part Number=C0603-10µ-10V-X7T-GRM188D71A106MA73, PartId=100200414, Published=2018-09-11, Supplier 1=Digi-Key, Supplier 2=Mouser, Supplier Part Number 2=81-GRM188D71A106MA3D
C61 C63: library part C0402-10n, "Capacitor, X7R, ±10%", Manufacturer=N.A., Part number IPS=00000007784, Part number NEMS=100200173, Artikkelnr Noca=20039166, Author=rsk, Component Class=Capacitors, Component Status=Active, ComponentLink1Description=Datasheet, ComponentLink1URL=N.A., ComponentLink2Description="Supplier link", ComponentLink2URL=N.A., Footprint Doc=0402, HelpURL=N.A., LatestRevisionDate=2009-11-23, Manufacturer Part Number=N.A., Note=16V, Pad Count=2, Part Number=C0402-10n, Part number Norautron=N.A., PartId=100200173, Published=2009-05-08, Supplier 1=N.A., Supplier 2=N.A., Supplier Part Number 1=N.A., Supplier Part Number 2=N.A.
C65 C66 C67: library part C0201-1n0, "Capacitor, X7R, ±10%, 25V", Manufacturer=N.A., Part number IPS=00000003206, Part number NEMS=100200056, Artikkelnr Noca=N.A., Author=rsk, Component Class=Capacitors, Component Status=Active, ComponentLink1Description=Datasheet, ComponentLink1URL=N.A., ComponentLink2Description="Supplier link", ComponentLink2URL=N.A., Footprint Doc=0201, HelpURL=N.A., LatestRevisionDate=2020-10-13, Manufacturer Part Number=N.A., Note=16V, Pad Count=2, Part Number=C0201-1n0, Part number Norautron=N.A., PartId=100200056, Published=2014-11-13, Supplier 1=N.A., Supplier 2=N.A., Supplier Part Number 1=N.A., Supplier Part Number 2=N.A.
C68 C69 C71: library part C0603-N.C., "Not mounted", Manufacturer=N.A., Part number NEMS=100200195, Artikkelnr Noca=N.A., Assembly="Not mounted", Author=rsk, Component Class=Capacitors, Component Status=Active, ComponentLink1Description=Datasheet, ComponentLink1URL=N.A., ComponentLink2Description="Supplier link", ComponentLink2URL=N.A., Footprint Doc=0603, HelpURL=N.A., LatestRevisionDate=2009-05-08, Manufacturer Part Number=N.A., Note="Chip Cap", Pad Count=2, Part Number=C0603-N.C., Part number IPS=N.A., Part number Norautron=N.A., PartId=100200195, Published=2009-05-08, Supplier 1=N.A., Supplier 2=N.A., Supplier Part Number 1=N.A., Supplier Part Number 2=N.A.
C70 C72: library part C0603-100n, "Chip Cap 0603", Manufacturer=N.A., Part number NEMS=100200265, Artikkelnr Noca=N.A., Author=rsk, Component Class=Capacitors, Component Status=Active, ComponentLink1Description=Datasheet, ComponentLink1URL=N.A., ComponentLink2Description="Supplier link", ComponentLink2URL=N.A., Footprint Doc=0603, HelpURL=N.A., LatestRevisionDate=2009-05-08, Manufacturer Part Number=N.A., Note="Chip Cap 1%", Pad Count=2, Part Number=C0603-100n, Part number IPS=N.A., Part number Norautron=N.A., PartId=100200265, Published=2009-05-08, Supplier 1=N.A., Supplier 2=N.A., Supplier Part Number 1=N.A., Supplier Part Number 2=N.A.
D1 D2 D3 D4: "DIODE SCHOTTKY 20V 500MA SOD882", Manufacturer="Central Semiconductor Corp.", Part number IPS=00000002493, Part number NEMS=101300101, Part number Norautron=N.A., Supplier Part Number 1="CFSH05-20L CT-ND", Artikkelnr Noca=N.A., Author=rsk, Component Class=Semiconductors, Component Status=Active, ComponentLink1Description=Datasheet, ComponentLink1URL=N.A., ComponentLink2Description="Supplier link", ComponentLink2URL=N.A., Footprint Doc=SOD-882L, HelpURL=http://www.centralsemi.com/PDFs/products/CFSH05-20L.PDF, LatestRevisionDate=2015-01-30, Manufacturer Part Number=CFSH05-20L, Note=N.A., Pad Count=2, Part Number=CFSH05-20L, PartId=101300101, Published=2015-01-30, Supplier 1=Digi-Key, Supplier 2=N.A., Supplier Part Number 2=N.A.
D5: "ESD Protection and EMI Filter for SIM Card Interface", Manufacturer="Texas Instruments", Part number IPS=N.A., Part number NEMS=101900729, Supplier Part Number 1=296-28299-1-ND, Artikkelnr Noca=N.A., Author=rubr, Component Class=Misc_ICs, Component Status=Active, ComponentLink1Description=Datasheet, ComponentLink1URL=https://www.ti.com/lit/ds/symlink/tpd3f303.pdf, ComponentLink2Description="Supplier link", ComponentLink2URL=https://www.digikey.com/en/products/detail/texas-instruments/TPD3F303DPVR/2605055, Footprint Doc=USON-8, HelpURL=https://www.ti.com/product/TPD3F303/part-details/TPD3F303DPVR, LatestRevisionDate=2022-10-19, Manufacturer Part Number=TPD3F303DPVR, Note=N.A., Pad Count=8, Part Number=TPD3F303DPVR, Part number Norautron=N.A., PartId=101900729, Published=2022-10-19, Supplier 1=Digi-Key, Supplier 2=Mouser, Supplier Part Number 2=595-TPD3F303DPVR
FB1: library part FB0603-22R@100MHz-6000mA, "Ferrite Bead, 22 Ohm @ 100MHz, 6000mA, 8 mOhm Max", Manufacturer=Murata, Manufacturer Part Number=BLM18SD220SN1D, Part number IPS=N.A., Supplier Part Number 1=490-15633-2-ND, Artikkelnr Noca=N.A., Author=kod1, Component Class=Inductors, Component Status=Active, ComponentLink1Description=Datasheet, ComponentLink1URL=N.A., ComponentLink2Description="Supplier link", ComponentLink2URL=https://www.murata.com/en-us/products/productdata/8796738650142/ENFA0003.pdf, Footprint Doc=0603, HelpURL=http://www.murata.com/en-global/products/productdata/8796733767710/S0580E.pdf, LatestRevisionDate=2024-01-25, Note="Chip EMIFIL Inductor Type Chip Ferrite Bead", Pad Count=2, Part Number=FB0603-22R@100MHz-6000mA, Part number Norautron=N.A., Published=2024-01-25, Supplier 1=Digi-Key, Supplier 2=N.A., Supplier Part Number 2=N.A.
FB2: library part FB0201-120R@100M-900mA-BLM03PX121SN1D, "Ferrite Bead, 120 Ohm @ 100MHz, 900mA, 160 mOhm Max", Manufacturer=Murata, Manufacturer Part Number=BLM03PX121SN1D, Part number IPS=N.A., Part number NEMS=100300405, Supplier Part Number 1=490-BLM03PX121SN1DTR-ND, Artikkelnr Noca=N.A., Author=rubr, Component Class=Inductors, Component Status=Active, ComponentLink1Description=Datasheet, ComponentLink1URL=https://www.murata.com/en-us/products/productdata/8796741140510/ENFA0020.pdf, ComponentLink2Description="Supplier link", ComponentLink2URL=N.A., Footprint Doc=0201, HelpURL=N.A., LatestRevisionDate=2022-01-19, Note=N.A., Pad Count=2, Part Number=FB0201-120R@100M-900mA-BLM03PX121SN1D, Part number Norautron=N.A., PartId=100300405, Published=2022-01-19, Supplier 1=Digi-Key, Supplier 2=N.A., Supplier Part Number 2=N.A.
FB3: library part FB0402-120R@100M-1200mA, "Ferrite Bead, 120 Ohm @ 100MHz, 1200mA, 75 mOhm Max", Manufacturer=Murata, Manufacturer Part Number=BLM15EX121SN1, Part number IPS=N.A., Part number NEMS=100300416, Supplier Part Number 1=490-16509-1-ND, Artikkelnr Noca=N.A., Author=masi, Component Class=Inductors, Component Status=Active, ComponentLink1Description=Datasheet, ComponentLink1URL=https://no.mouser.com/datasheet/2/281/ENFA0023-1915680.pdf, ComponentLink2Description="Supplier link", ComponentLink2URL=https://www.murata.com/en-eu/products/productdetail?partno=BLM15EX121SN1%23, Footprint Doc=0402, HelpURL=N.A., LatestRevisionDate=2022-05-23, Note=N.A., Pad Count=2, Part Number=FB0402-120R@100M-1200mA, Part number Norautron=N.A., PartId=100300416, Published=2022-05-23, Supplier 1=Digi-Key, Supplier 2=Mouser, Supplier Part Number 2=81-BLM15EX121SN1D
FB4 FB5 FB6: library part R0805-0R, "Resistor, ±5%, 0.125W", Manufacturer=N.A., Part number NEMS=100100375, Artikkelnr Noca=27089000, Author=rsk, Component Class=Resistors, Component Status=Active, ComponentLink1Description=Datasheet, ComponentLink1URL=N.A., ComponentLink2Description="Supplier link", ComponentLink2URL=N.A., Footprint Doc=0805, HelpURL=N.A., LatestRevisionDate=2013-06-04, Manufacturer Part Number=N.A., Note="Chip Res 5%", Pad Count=2, Part Number=R0805-0R, Part number IPS=N.A., Part number Norautron=N.A., PartId=100100375, Published=2009-05-08, Supplier 1=N.A., Supplier 2=N.A., Supplier Part Number 1=N.A., Supplier Part Number 2=N.A.
Fid1 Fid2 Fid3: library part Fid-Mark, "Fiducial Mark", Manufacturer=N.A., Part number NEMS=100500073, Artikkelnr Noca=N.A., Assembly="Not mounted", Author=rsk, Component Class=Connectors, Component Status=Active, ComponentLink1Description=Datasheet, ComponentLink1URL=N.A., ComponentLink2Description="Supplier link", ComponentLink2URL=N.A., Footprint Doc=Fiducial, HelpURL=N.A., LatestRevisionDate=2009-12-12, Manufacturer Part Number=N.A., Note=N.A., Pad Count=1, Part Number=Fid-Mark, Part number IPS=N.A., Part number Norautron=N.A., PartId=100500073, Published=2009-12-12, Supplier 1=N.A., Supplier 2=N.A., Supplier Part Number 1=N.A., Supplier Part Number 2=N.A., System=Connector
J1: "Coaxial Connector with Switch", Manufacturer=Murata, Part number IPS=00000009955, Part number NEMS=100500400, Part number Norautron=26030338, Supplier Part Number 1=490-4981-1-ND, Artikkelnr Noca=55029011, Author=rsk, Component Class=Connectors, Component Status=Active, ComponentLink1Description=Datasheet, ComponentLink1URL=N.A., ComponentLink2Description="Supplier link", ComponentLink2URL=N.A., Footprint Doc=COAXIAL-SWF, HelpURL=http://www.murata.com/products/catalog/pdf/o33e.pdf, LatestRevisionDate=2014-04-24, Manufacturer Part Number=MM8130-2600, Note=N.A., Pad Count=3, Part Number=MM8130-2600, PartId=100500400, Published=2014-04-24, Supplier 1=Digi-Key, Supplier 2=Mouser, Supplier Part Number 2=81-MM8130-2600RA2, System=Connector
J2: library part 20279-001E-03, "Ultraminiature Coaxial Connector, 50 Ohm, SMD", Manufacturer=Wellshow, Part number IPS=00000004436, Part number NEMS=100500636, Part number Norautron=N.A., Artikkelnr Noca=N.A., Author=rsk, Component Class=Connectors, Component Status=Active, ComponentLink1Description=Datasheet, ComponentLink1URL=\\hizz\pro\app9717\Datasheet\connectors\Wellshow\20279C18.pdf, ComponentLink2Description="Supplier link", ComponentLink2URL=N.A., Footprint Doc="COAXIAL RF MHFI", HelpURL=N.A., LatestRevisionDate=2020-04-28, Manufacturer Part Number=20279-001E-03, Note=N.A., Pad Count=3, Part Number=20279-001E-03, PartId=100500636, Published=2020-01-07, Supplier 1=Cabcon, Supplier 2=Digi-Key, Supplier Part Number 1=20279-001E-03, Supplier Part Number 2=H11891DKR-ND, System=Connector
J4: library part TC2050-IDC-NLFP, "CBL PLUG-OF-NAILS 10-PIN", Manufacturer="Tag-Connect LLC", Part number IPS=N.A., Part number NEMS=100500463, Supplier Part Number 1=TC2050-IDC-NL-ND, Artikkelnr Noca=N.A., Author=rsk, Component Class=Connectors, Component Status=Active, ComponentLink1Description=Datasheet, ComponentLink1URL=N.A., ComponentLink2Description="Supplier link", ComponentLink2URL=N.A., Footprint Doc=TC2050-IDC-NLFP, HelpURL=http://www.tag-connect.com/Materials/TC2050-IDC%20Datasheet.pdf, LatestRevisionDate=2012-11-21, Manufacturer Part Number=TC2050-IDC-NLFP, Note=N.A., Pad Count=10, Part Number=TC2050-IDC-NLFP, Part number Norautron=N.A., PartId=100500463, Published=2012-11-21, Supplier 1=Digi-Key, Supplier 2=N.A., Supplier Part Number 2=N.A., System=Connector
J5: library part L-KLS1-SIM-066-(6+1)P-H1.37-R, "Nano SIM Card Connector, Push-Push, 6-Pin, H1.37mm, with CD Pin", Manufacturer="KLS Electronic", Part number IPS=N.A., Part number NEMS=100500776, Artikkelnr Noca=N.A., Author=rubr, Component Class=Connectors, Component Status=Active, ComponentLink1Description=Datasheet, ComponentLink1URL=https://klsele.com/admin/product_upload/20190123133741L-KLS1-SIM-066-(6+1)P-H1.37-R--.pdf, ComponentLink2Description="Supplier link", ComponentLink2URL=N.A., Footprint Doc=KLS1-SIM-066, HelpURL=https://klsele.com/products/connectors/SIM-card-connectors-Micro-SIM-card-connectors-Nano-SIM-Card-Connectors/4918.html, LatestRevisionDate=2023-01-01, Manufacturer Part Number=L-KLS1-SIM-066-(6+1)P-H1.37-R, Note=N.A., Pad Count=7, Part Number=L-KLS1-SIM-066-(6+1)P-H1.37-R, Part number Norautron=N.A., PartId=100500776, Published=2023-01-01, Supplier 1=Cabcon, Supplier 2=N.A., Supplier Part Number 1=L-KLS1-SIM-066-(6+1)P-H1.37-R, Supplier Part Number 2=N.A., System=Connector
J6: library part 80259-1021, "USB-C Receptacle, 16 Pin, USB 2.0", Manufacturer="Bellweather Electronic Corp.", Part number IPS=N.A., Part number NEMS=100500830, Artikkelnr Noca=N.A., Author=getr, Component Class=Connectors, Component Status=Active, ComponentLink1Description=Datasheet, ComponentLink1URL=\\hizz\pro\app9717\Datasheet\connectors\Bellwether\SD-80259-001_C.pdf, ComponentLink2Description="Supplier link", ComponentLink2URL=N.A., Footprint Doc=SD-80259-001, HelpURL=N.A., LatestRevisionDate=2024-03-26, Manufacturer Part Number=80259-1021, Note=N.A., Pad Count=16, Part Number=80259-1021, Part number Norautron=N.A., PartId=100500830, Published=2023-10-30, Supplier 1=Cabcon, Supplier 2=N.A., Supplier Part Number 1=80259-1021, Supplier Part Number 2=N.A., System=Connector
J8: library part Molex_502774-0891, "1.10mm Pitch microSD Memory Card Connector, Reverse Mount Surface Mount, Push-Push Type", Manufacturer=Molex, Manufacturer Part Number=502774-0891, Part number IPS=00000001284, Part number NEMS=100500509, Part number Norautron=N.A., Supplier Part Number 1=WM24066CT-ND, Artikkelnr Noca=N.A., Assembly="Not mounted", Author=rsk, Component Class=Connectors, Component Status=Active, ComponentLink1Description=Datasheet, ComponentLink1URL=http://www.molex.com/pdm_docs/sd/5027740891_sd.pdf, ComponentLink2Description="Supplier link", ComponentLink2URL=N.A., Footprint Doc="Molex 502774-0891", HelpURL=https://www.molex.com/molex/products/part-detail/memory_card_socket/5027740891, LatestRevisionDate=2020-02-06, Note=N.A., Pad Count=14, Part Number=Molex_502774-0891, PartId=100500509, Published=2017-11-08, Supplier 1=Digi-Key, Supplier 2=Elfa, Supplier Part Number 2=300-76-403, System=Connector
L1: library part L0201-1n5-HQ-Murata, "Inductor, 1000mA, ±0.1ｎH, 50mOhm", Manufacturer=Murata, Manufacturer Part Number=LQP03HQ1N5B02, Part number IPS=N.A., Part number NEMS=100300202, Supplier Part Number 1=490-13881-1-ND, Artikkelnr Noca=N.A., Author=rsk, Component Class=Inductors, Component Status=Active, ComponentLink1Description=Datasheet, ComponentLink1URL=https://search.murata.co.jp/Ceramy/image/img/P02/JELF243C-0021.pdf, ComponentLink2Description="Supplier link", ComponentLink2URL=N.A., Footprint Doc=0201, HelpURL=https://psearch.en.murata.com/inductor/product/LQP03HQ1N5B02%23.html, LatestRevisionDate=2018-10-23, Note="-55°C ~ 125°C", Pad Count=2, Part Number=L0201-1n5-HQ-Murata, Part number Norautron=N.A., PartId=100300202, Published=2018-10-23, Supplier 1=Digi-Key, Supplier 2=N.A., Supplier Part Number 2=N.A.
L2: library part L0201-22n, "Chip Inductor", Manufacturer=N.A., Part number IPS=00000001478, Part number NEMS=100300034, Artikkelnr Noca=N.A., Author=rsk, Component Class=Inductors, Component Status=Active, ComponentLink1Description=Datasheet, ComponentLink1URL=N.A., ComponentLink2Description="Supplier link", ComponentLink2URL=N.A., Footprint Doc=0201, HelpURL=N.A., LatestRevisionDate=2019-08-29, Manufacturer Part Number=N.A., Note="High frequency chip inductor ±10%", Pad Count=2, Part Number=L0201-22n, Part number Norautron=N.A., PartId=100300034, Published=2013-04-10, Supplier 1=N.A., Supplier 2=N.A., Supplier Part Number 1=N.A., Supplier Part Number 2=N.A.
L3: library part L0402-68n-Wirewound-Murata, "Inductor, 140mA, ±2%, 1960mΩ, Q=20", Manufacturer=Murata, Manufacturer Part Number=LQW15AN68NG00, Part number IPS=00000002494, Part number NEMS=100300389, Part number Norautron=N.A., Supplier Part Number 1=490-6837-1-ND, Artikkelnr Noca=N.A., Author=rsk, Component Class=Inductors, Component Status=Active, ComponentLink1Description=Datasheet, ComponentLink1URL=https://search.murata.co.jp/Ceramy/image/img/P02/JELF243A-0050.pdf, ComponentLink2Description="Supplier link", ComponentLink2URL=N.A., Footprint Doc=0402, HelpURL=https://psearch.en.murata.com/inductor/product/LQW15AN68NG00%23.html, LatestRevisionDate=2019-04-16, Note="-55°C ~ 125°C", Pad Count=2, Part Number=L0402-68n-Wirewound-Murata, PartId=100300389, Published=2019-04-16, Supplier 1=Digi-Key, Supplier 2=N.A., Supplier Part Number 2=N.A.
L4 L5: library part L0402-N.C., "Not mounted", Manufacturer=N.A., Part number NEMS=100300037, Artikkelnr Noca=N.A., Assembly="Not mounted", Author=rsk, Component Class=Inductors, Component Status=Active, ComponentLink1Description=Datasheet, ComponentLink1URL=N.A., ComponentLink2Description="Supplier link", ComponentLink2URL=N.A., Footprint Doc=0402, HelpURL=N.A., LatestRevisionDate=2016-11-24, Manufacturer Part Number=N.A., Note=N.A., Pad Count=2, Part Number=L0402-N.C., Part number IPS=N.A., Part number Norautron=N.A., PartId=100300037, Published=2016-11-24, Supplier 1=N.A., Supplier 2=N.A., Supplier Part Number 1=N.A., Supplier Part Number 2=N.A.
L6: library part L0402-9n1-Wirewound-Murata, "Inductor, 540mA, ±2%, 140mΩ, Q=25", Manufacturer=Murata, Manufacturer Part Number=LQW15AN9N1G00, Part number IPS=00000002497, Part number NEMS=100300357, Part number Norautron=N.A., Supplier Part Number 1=490-6854-1-ND, Artikkelnr Noca=N.A., Author=rsk, Component Class=Inductors, Component Status=Active, ComponentLink1Description=Datasheet, ComponentLink1URL=https://search.murata.co.jp/Ceramy/image/img/P02/JELF243A-0050.pdf, ComponentLink2Description="Supplier link", ComponentLink2URL=N.A., Footprint Doc=0402, HelpURL=https://psearch.en.murata.com/inductor/product/LQW15AN9N1G00%23.html, LatestRevisionDate=2019-04-16, Note="-55°C ~ 125°C", Pad Count=2, Part Number=L0402-9n1-Wirewound-Murata, PartId=100300357, Published=2019-04-16, Supplier 1=Digi-Key, Supplier 2=N.A., Supplier Part Number 2=N.A.
L7 L8: library part L0806-2µ2-2500mA-73mOhm-CIGT201610EH2R2MNE, "Inductor, Irms=2.5A, Isat=2.9A, ±20%, DCR=73mΩ", Manufacturer="Samsung Electro-Mechanics America", Manufacturer Part Number=CIGT201610EH2R2MNE, Part number IPS=N.A., Part number NEMS=100300400, Part number Norautron=26521789, Supplier Part Number 1=1276-6901-1-ND, Artikkelnr Noca=N.A., Author=rsk, Component Class=Inductors, Component Status=Active, ComponentLink1Description=Datasheet, ComponentLink1URL=https://media.digikey.com/pdf/Data%20Sheets/Samsung%20PDFs/CIGT201610EH2R2MNE_Spec.pdf, ComponentLink2Description="Supplier link", ComponentLink2URL=https://www.digikey.com/en/products/detail/samsung-electro-mechanics/CIGT201610EH2R2MNE/7041223?s=N4IgTCBcDaIMIEkDiAVMAGAjANk%2BgogBJgBKYAsgHL4gC6AvkA, Footprint Doc=0806, HelpURL=http://product.samsungsem.com/pi/CIGT201610EH2R2MN.do, LatestRevisionDate=2022-09-07, Note="Unshielded Thin Film Inductor", Pad Count=2, Part Number=L0806-2µ2-2500mA-73mOhm-CIGT201610EH2R2MNE, PartId=100300400, Published=2021-02-03, Supplier 1=Digi-Key, Supplier 2=Mouser, Supplier Part Number 2=187-CIGT201610EH2R2M
LABEL1: library part Label_15x40, "PCA version label, stick-on, 15x40mm", Manufacturer="Ellco Etikett", Manufacturer Part Number=51945, Part number IPS=N.A., Part number NEMS=101200030, Artikkelnr Noca=N.A., Assembly="See section for \"Marking/ Stick-on label specification", Author=hany, Component Class=Mechanicals, Component Status=Active, ComponentLink1Description=Datasheet, ComponentLink1URL=N.A., ComponentLink2Description="Supplier link", ComponentLink2URL=N.A., Footprint Doc=Label, HelpURL=N.A., LatestRevisionDate=2023-01-05, Note=N.A., Pad Count=0, Part Number=Label_15x40, Part number Norautron=N.A., PartId=101200030, Published=2023-01-05, Supplier 1=N.A., Supplier 2=N.A., Supplier Part Number 1=N.A., Supplier Part Number 2=N.A.
LED1 LED2 LED3 LED4 LED5: library part "VS 25C7M5", "LED, Green, 0603, 573nm, Vf=2.0V, 24mcd, - 40 to +85°C", Manufacturer="Victory Electronics", Part number IPS="00000001274, 00000009961", Part number NEMS=101400097, Part number Norautron=26313411, Supplier Part Number 1=N.A., Artikkelnr Noca=13019193, Author=rsk, Component Class=Optoelectronics, Component Status=Active, ComponentLink1Description=Datasheet, ComponentLink1URL=N.A., ComponentLink2Description="Supplier link", ComponentLink2URL=N.A., Footprint Doc=0603, HelpURL="\\hizz\pro\app9717\Datasheet\optoelectronics\Victory Electronics\VS 25C7M5.pdf", LatestRevisionDate=2020-10-23, Manufacturer Part Number="VS 25C7M5", Note=N.A., Pad Count=2, Part Number="VS 25C7M5", PartId=101400097, Published=2017-08-21, Supplier 1="EC Partner", Supplier 2=N.A., Supplier Part Number 2=N.A.
LOGO1: library part "WEEE Symbol 3x4.5mm", "WEEE Directive symbol", Manufacturer=N.A., Part number NEMS=101100006, Artikkelnr Noca=N.A., Author=rsk, Component Class=Markings, Component Status=Active, ComponentLink1Description=Datasheet, ComponentLink1URL=N.A., ComponentLink2Description="Supplier link", ComponentLink2URL=N.A., Footprint Doc=WEE_3x4.5mm, HelpURL=N.A., LatestRevisionDate=2023-03-07, Manufacturer Part Number=N.A., Note=N.A., Pad Count=0, Part Number="WEEE Symbol 3x4.5mm", Part number IPS=N.A., Part number Norautron=N.A., PartId=101100006, Published=2016-09-07, Supplier 1=N.A., Supplier 2=N.A., Supplier Part Number 1=N.A., Supplier Part Number 2=N.A.